# Altium PCB Time4CM4_Riser.PcbDoc (part 2 of 2)
Units mil, origin at the board's own origin, x right, y up, seen from the top; angles counter-clockwise.
Board outline 2171.6 x 1574.73 mil, 2 copper layers (Top Layer, Bottom Layer), stack 61.756 mil thick; 2 components, 138 nets, 412 pads, 162 vias.
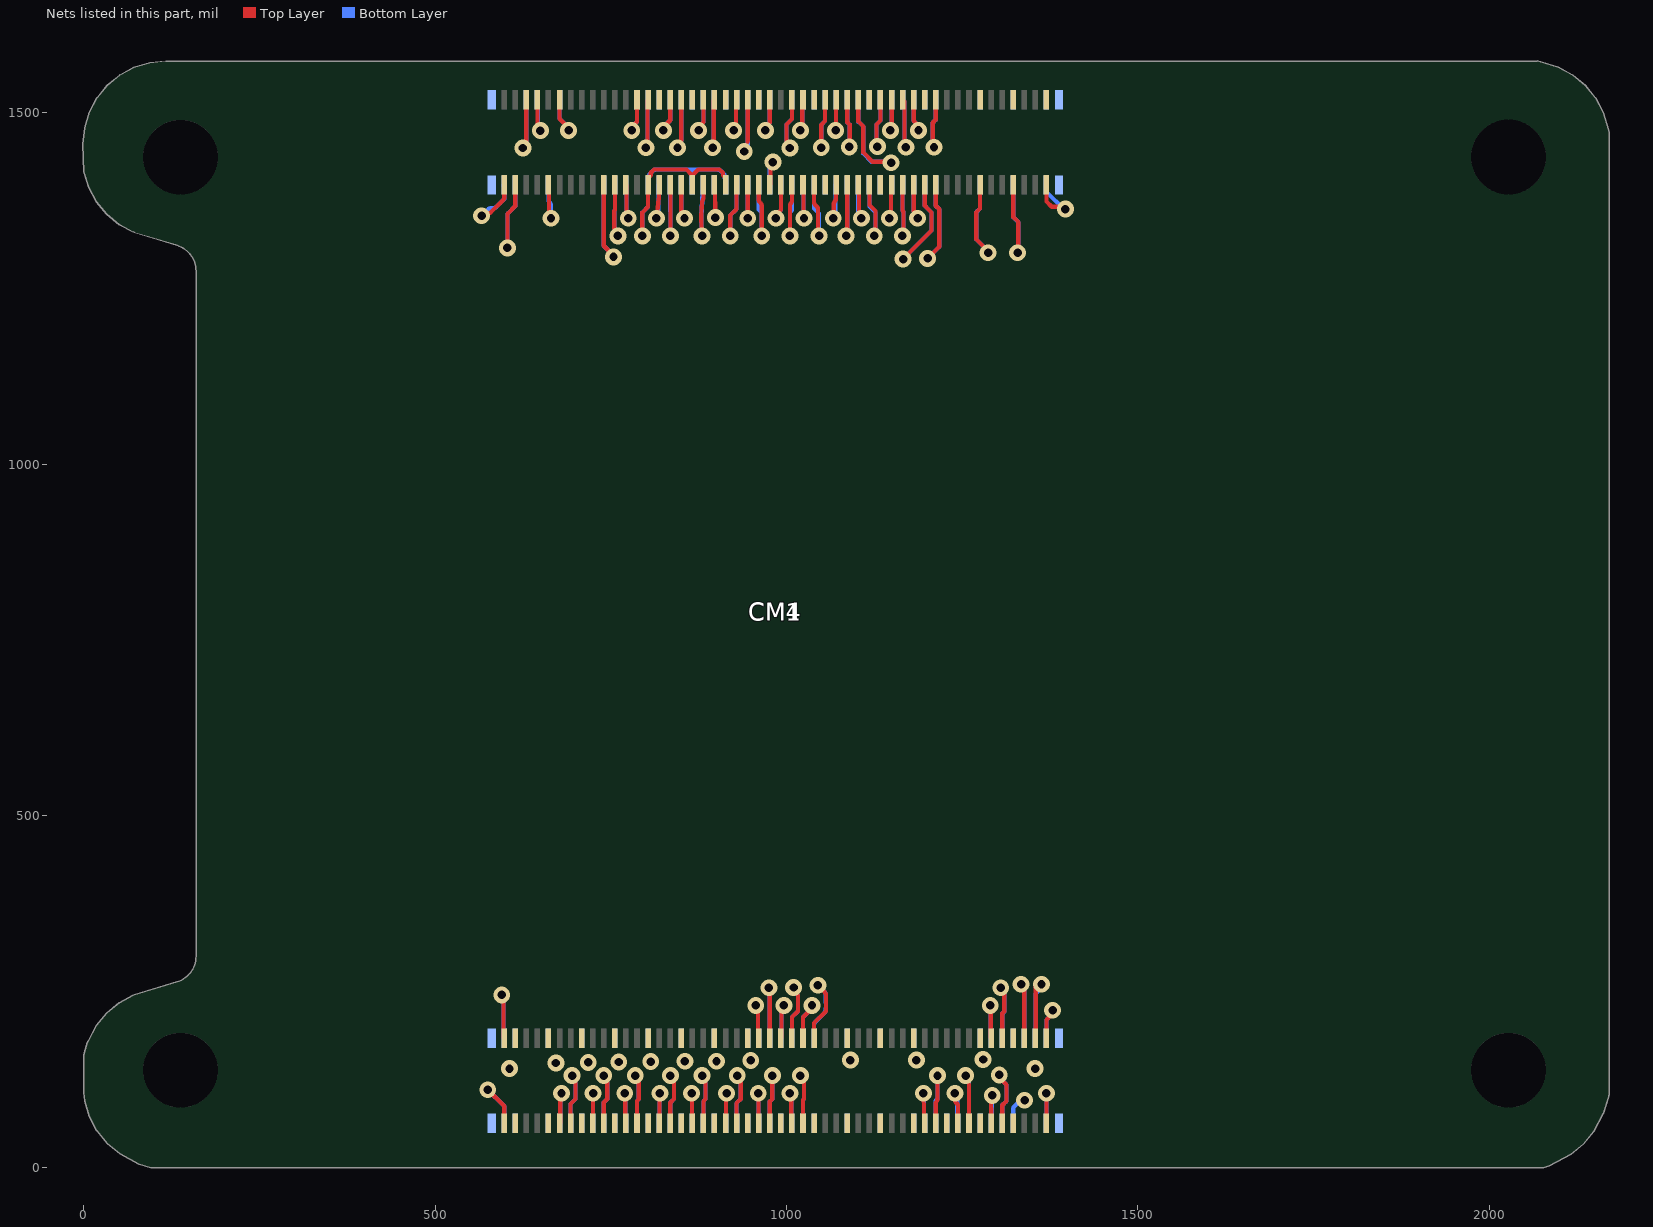
[diagram p2: the nets of this part, all layers, seen from the top]

## Via types
v1: diameter 24, hole 12, Top Layer to Bottom Layer, tented both sides, 162 vias

## Nets (pads, with @x,y where several pads share a name; then routed paths per layer and width w, separated by ;. In a path a pad name is that pad's centre, name@x,y a point inside that pad or via, vN(x,y) a via of type N, cw(c..) or ccw(c..) an arc to the next point about the centre after c; other vN are vias at no path point) (continued)
GND: CM1.1 CM1.2 CM1.7 CM1.8 CM1.13 CM1.14 CM1.22 CM1.23 CM1.32 CM1.33 CM1.42 CM1.43 CM1.52 CM1.53 CM1.59 CM1.60 CM1.65 CM1.66 CM1.71 CM1.74 CM1.98 CM1.107 CM1.108 CM1.113 CM1.114 CM1.120 CM1.125 CM1.126 CM1.131 CM1.132 CM1.137 CM1.138 CM1.144 CM1.150 CM1.155 CM1.156 CM1.161 CM1.162 CM1.167 CM1.168 CM1.173 CM1.174 CM1.179 CM1.180 CM1.185 CM1.186 CM1.191 CM1.192 CM1.197 CM1.198 CM4.1 CM4.2 CM4.7 CM4.8 CM4.13 CM4.14 CM4.22 CM4.23 CM4.32 CM4.33 CM4.42 CM4.43 CM4.52 CM4.53 CM4.59 CM4.60 CM4.65 CM4.66 CM4.71 CM4.74 CM4.98 CM4.107 CM4.108 CM4.113 CM4.114 CM4.120 CM4.125 CM4.126 CM4.131 CM4.132 CM4.137 CM4.138 CM4.144 CM4.150 CM4.155 CM4.156 CM4.161 CM4.162 CM4.167 CM4.168 CM4.173 CM4.174 CM4.179 CM4.180 CM4.185 CM4.186 CM4.191 CM4.192 CM4.197 CM4.198 pad.2 | length 1520.5
  Top Layer w6: v1(603.06,1307.94) 603.06,1356.34 614.17,1367.46 CM4.98@614.17,1397.64 ; v1(795,1325) 795,1358.28 803.15,1366.43 CM4.74@803.15,1397.64 804.09,1398.58 804.09,1408.42 806.96,1411.29 806.96,1414.73 811.65,1419.42 857.65,1419.42 865.16,1411.9 ; CM4.66@866.14,1397.64 866.42,1397.91 866.42,1411.19 874.64,1419.42 904.89,1419.42 909.57,1414.73 909.57,1411.29 912.45,1408.42 912.45,1398.58 CM4.60@913.39,1397.64 ; CM4.52@976.38,1397.64 977.31,1398.58 977.31,1426.64 v1(980.67,1430) ; v1(1201,1293) 1217.61,1309.61 1217.61,1362.84 1212.6,1367.86 CM4.22@1212.6,1397.64 ; CM4.14@1275.59,1397.64 1275.59,1363.87 1270,1358.28 1270,1320.28 1287,1303.28 v1(1287,1301) ; CM4.8@1322.83,1397.64 1322.83,1351.67 1330,1344.5 1330,1302 v1(1329,1301) ; CM4.2@1370.08,1397.64 1370.08,1374.01 1377.65,1366.44 1393.56,1366.44 v1(1397,1363)
  Bottom Layer w6: v1(603.06,1307.94) 603.06,1356.34 614.17,1367.46 CM1.98@614.17,1397.44 ; v1(795,1325) 795,1358.28 803.15,1366.43 CM1.74@803.15,1397.44 804.09,1398.38 804.09,1406.65 cw(c810.09,1406.61) 804.12,1407.27 804.37,1409.49 804.44,1410.14 cw(c810.4,1409.49) 806.14,1413.72 806.95,1414.52 809.91,1417.48 cw(c814.13,1413.22) 814.13,1419.22 862.45,1419.22 ; CM1.66@866.14,1397.44 865.2,1398.38 865.2,1416.46 862.45,1419.22 ; 909.57,1414.53 910.35,1413.76 cw(c906.13,1409.49) 912.1,1410.14 912.17,1409.49 912.41,1407.27 cw(c906.45,1406.61) 912.45,1406.61 912.45,1398.38 CM1.60@913.39,1397.44 ; 909.55,1414.56 906.63,1417.48 ccw(c902.4,1413.22) 902.4,1419.22 862.45,1419.22 ; CM1.52@976.38,1397.44 976.38,1423.22 cw(c982.38,1423.22) 978.14,1427.46 v1(980.67,1430) ; v1(1201,1293) 1217.61,1309.61 1217.61,1362.84 1212.6,1367.86 CM1.22@1212.6,1397.44 ; CM1.14@1275.59,1397.44 1275.59,1363.87 1270.92,1359.21 1270,1358.28 1270,1320.28 1287,1303.28 v1(1287,1301) ; CM1.108@1322.83,62.01 1322.83,82.5 cw(c1328.83,82.5) 1324.8,86.95 1327.29,89.2 ccw(c1323.26,93.64) 1327.48,89.38 1331.36,93.26 cw(c1335.58,89) 1335.58,95 v1(1339,95) ; CM1.8@1322.83,1397.44 1322.83,1351.57 1330,1344.41 1330,1302 v1(1329,1301) ; CM1.2@1370.08,1397.44 1370.08,1387.6 1394.68,1363 v1(1397,1363)
  other v1: 606,140 1354,140 672,148 717.98,148.87 761.5,149.46 807,150 855.51,150.51 900.51,150.51 949.34,151.61 1091,152 1185,152 1280,153
GPIO_0: CM1.36 CM4.36 | length 100.6
  Top Layer w6: CM4.36@1102.36,1397.64 1103.3,1396.7 1103.3,1353.32 v1(1106.61,1350) v1@1105,1348.39
  Bottom Layer w6: CM1.36@1102.36,1397.44 1102.36,1356.74 ccw(c1108.36,1356.74) v1@1104.1,1352.51 ; v1@1104.12,1352.5 v1(1106.61,1350)
GPIO_1: CM1.35 CM4.35 | length 250.3
  Top Layer w6: CM4.35@1103.3,1529.68 1103.3,1519.84 CM4.35@1102.36,1518.9 1102.36,1487.64 1109.49,1480.51 1109.49,1443.72 1122.7,1430.51 1147.49,1430.51 v1(1149,1429) v1@1151,1431
  Bottom Layer w6: CM1.35@1102.36,1518.7 1102.36,1487.51 1109.49,1480.38 1109.49,1458.79 1109.49,1442.22 1121.21,1430.51 v1@1137.78,1430.51
GPIO_2: CM1.58 CM4.58 | length 155.2
  Top Layer w6: v1@918.44,1329.74 ccw(c924.44,1329.74) v1@918.98,1327.25 ; v1(920,1325) 920,1353.8 929.13,1362.93 CM4.58@929.13,1397.64
  Bottom Layer w6: v1(920,1325) 920,1353.7 929.13,1362.83 CM1.58@929.13,1397.44
GPIO_3: CM1.56 CM4.56 | length 95.2
  Top Layer w6: CM4.56@944.88,1397.64 944.94,1397.58 944.94,1350.06 v1(945,1350)
  Bottom Layer w6: CM1.56@944.88,1397.44 944.94,1397.38 944.94,1350.06 v1(945,1350)
GPIO_4: CM1.54 CM4.54 | length 151.6
  Top Layer w6: CM4.54@960.63,1397.64 960.63,1376.85 ; 963.27,1371.73 cw(c959,1367.51) 965,1367.51 v1(965,1325) ; 960.63,1376.86 ccw(c966.63,1376.86) 962.38,1372.62 cw(c966.63,1376.86) 960.63,1376.85
  Bottom Layer w6: CM1.54@960.63,1397.44 960.63,1362.65 965,1358.28 v1(965,1325)
GPIO_5: CM1.34 CM4.34 | length 153.5
  Top Layer w6: CM4.34@1118.11,1397.64 1118.11,1368.72 1126.61,1360.22 1126.61,1326.61 v1(1125,1325)
  Bottom Layer w6: CM1.34@1118.11,1397.44 1118.11,1366.79 1126.61,1358.28 1126.61,1326.61 v1(1125,1325)
GPIO_6: CM1.30 CM4.30 | length 99.8
  Top Layer w6: v1@1145,1348.39 v1(1146.61,1350) 1148.67,1352.06 1148.67,1396.7 CM4.30@1149.61,1397.64
  Bottom Layer w6: v1(1146.61,1350) 1148.67,1352.06 1148.67,1396.5 CM1.30@1149.61,1397.44
GPIO_7: CM1.37 CM4.37 | length 137.8
  Top Layer w6: CM4.37@1086.61,1518.9 1086.61,1486.67 1090,1483.28 1090,1452.02 v1(1089.49,1451.52)
  Bottom Layer w6: CM1.37@1086.61,1518.7 1086.61,1486.67 1090,1483.28 1090,1452.02 v1(1089.49,1451.52)
GPIO_8: CM1.39 CM4.39 | length 88.3
  Top Layer w6: v1(1070,1475) 1070.43,1475.43 1070.43,1518.47 CM4.39@1070.87,1518.9
  Bottom Layer w6: v1(1070,1475) 1070.43,1475.43 1070.43,1518.27 CM1.39@1070.87,1518.7
GPIO_9: CM1.40 CM4.40 | length 97
  Top Layer w6: v1@1066.61,1350 ccw(c1061.43,1353.03) 1067.43,1352.99 1067.43,1369.95 cw(c1073.43,1369.95) 1068.71,1373.65 ; 1069.16,1374.22 ccw(c1064.43,1377.92) 1070.43,1377.92 1070.43,1386.86 CM4.40@1070.87,1397.64
  Bottom Layer w6: v1(1066.61,1350) 1069.93,1353.32 1069.93,1396.5 CM1.40@1070.87,1397.44
GPIO_10: CM1.44 CM4.44 | length 159.8
  Top Layer w6: CM4.44@1039.37,1397.64 1039.37,1373.11 ; v1(1046.5,1325) 1045,1326.5 1045,1362.51 ; 1039.37,1373.12 ccw(c1045.37,1373.12) 1041.11,1368.89 ; 1039.37,1373.11 ccw(c1045.37,1373.12) 1041.11,1368.89 ; 1041.11,1368.89 1043.26,1366.74 ; 1043.27,1366.73 cw(c1039,1362.51) 1045,1362.51 ; 1043.27,1366.73 cw(c1039,1362.51) 1045,1362.51
  Bottom Layer w6: CM1.44@1039.37,1397.44 1039.37,1363.91 1046.5,1356.78 v1(1046.5,1325)
GPIO_11: CM1.38 CM4.38 | length 153.4
  Top Layer w6: v1@1085,1323.39 v1@1088.31,1326.69 ; v1(1085,1325) 1086.69,1326.69 v1@1088.31,1326.69 ; CM4.38@1086.61,1397.64 1086.61,1328.39 v1@1088.31,1326.69
  Bottom Layer w6: v1(1085,1325) 1086.61,1326.61 CM1.38@1086.61,1397.44
GPIO_12: CM1.31 CM4.31 | length 139.7
  Top Layer w6: v1(1129.49,1452) 1128,1453.49 1128,1483.28 1133.86,1489.14 CM4.31@1133.86,1518.9
  Bottom Layer w6: v1(1129.49,1452) 1128,1453.49 1128,1483.28 1133.86,1489.14 CM1.31@1133.86,1518.7
GPIO_13: CM1.28 CM4.28 | length 147.5
  Top Layer w6: v1(1165,1325) 1166.61,1326.61 1166.61,1359.46 1165.35,1360.72 CM4.28@1165.35,1397.64
  Bottom Layer w6: v1(1165,1325) 1166.61,1326.61 1166.61,1359.36 1165.35,1360.62 CM1.28@1165.35,1397.44
GPIO_16: CM1.29 CM4.29 | length 89.3
  Top Layer w6: v1(1148,1475) 1149.8,1476.8 1149.8,1518.7 CM4.29@1149.61,1518.9
  Bottom Layer w6: v1(1148,1475) 1149.8,1476.8 1149.8,1518.5 CM1.29@1149.61,1518.7
GPIO_17: CM1.50 CM4.50 | length 96.1
  Top Layer w6: v1@985,1354.87 992.13,1362 CM4.50@992.13,1397.64
  Bottom Layer w6: v1(985,1350) 985,1354.87 992.13,1362 CM1.50@992.13,1397.44
GPIO_19: CM1.26 CM4.26 | length 87
  Top Layer w6: v1@1181.1,1360.38 CM4.26@1181.1,1397.64
  Bottom Layer w6: CM1.26@1181.1,1397.44 1181.1,1360.38 1186.61,1354.87 v1(1186.61,1350)
GPIO_20: CM1.27 CM4.27 | length 139.4
  Top Layer w6: CM4.27@1165.35,1518.9 1168,1516.25 1168,1453 v1(1170,1451)
  Bottom Layer w6: CM1.27@1165.35,1518.7 1168,1516.05 1168,1453 v1(1170,1451)
GPIO_21: CM1.25 CM4.25 | length 93.2
  Top Layer w6: CM4.25@1181.1,1518.9 1181.1,1488.77 1192,1477.87 1189.13,1475 v1(1188,1475)
  Bottom Layer w6: CM1.25@1181.1,1518.7 1181.1,1488.77 v1@1190,1479.87
GPIO_22: CM1.46 CM4.46 | length 96.2
  Top Layer w6: CM4.46@1023.62,1397.64 1024.31,1396.95 1024.31,1350.69 v1(1025,1350)
  Bottom Layer w6: CM1.46@1023.62,1397.44 1024.31,1396.75 1024.31,1350.69 v1(1025,1350)
GPIO_23: CM1.47 CM4.47 | length 148.3
  Top Layer w6: v1(1005,1450) 1005,1454.87 1000,1459.87 1000,1483.28 1007.87,1491.16 CM4.47@1007.87,1518.9
  Bottom Layer w6: v1(1005,1450) 1005,1454.87 1000,1459.87 1000,1483.28 1007.87,1491.16 CM1.47@1007.87,1518.7
GPIO_24: CM1.45 CM4.45 | length 90.6
  Top Layer w6: v1(1020,1475) 1022.68,1477.69 1022.68,1517.96 CM4.45@1023.62,1518.9
  Bottom Layer w6: v1(1020,1475) 1022.68,1477.69 1022.68,1517.76 CM1.45@1023.62,1518.7
GPIO_25: CM1.41 CM4.41 | length 141.2
  Top Layer w6: v1(1049.49,1450.51) 1049.49,1482.78 1055.12,1488.4 CM4.41@1055.12,1518.9
  Bottom Layer w6: v1(1049.49,1450.51) 1049.49,1482.78 1055.12,1488.4 CM1.41@1055.12,1518.7
GPIO_26: CM1.24 CM4.24 | length 252.8
  Top Layer w6: v1(1166,1292) 1206.61,1332.61 1206.61,1358.28 1201.6,1363.3 1196.85,1368.05 CM4.24@1196.85,1397.64
  Bottom Layer w6: v1(1166,1292) 1206.61,1332.61 1206.61,1358.28 1201.6,1363.3 1196.85,1368.05 CM1.24@1196.85,1397.44
GPIO_27: CM1.48 CM4.48 | length 158.1
  Top Layer w6: v1(1005,1325) 1005,1367.51 ; CM4.48@1007.87,1397.64 1007.87,1375.36 ; 1005,1367.51 cw(c1011,1367.51) 1006.17,1371.07 ccw(c1011,1367.51) 1005,1367.51 ; 1007.87,1375.36 cw(c1001.87,1375.36) 1006.7,1371.8 ccw(c1001.87,1375.36) 1007.87,1375.36
  Bottom Layer w6: v1(1005,1325) 1005,1356.07 ; 1006.75,1360.3 ccw(c1011,1356.07) 1005,1356.07 ; CM1.48@1007.87,1397.44 1007.87,1361.42 1006.76,1360.31 ccw(c1011,1356.07) 1005,1356.07
GPIO_44: CM1.82 CM4.82 | length 216.5
  Top Layer w6: CM4.82@740.16,1397.64 740.16,1310.86 754,1297.02 v1(754,1295)
  Bottom Layer w6: CM1.82@740.16,1397.44 740.16,1310.86 754,1297.02 v1(754,1295)
GPIO_45: CM1.80 CM4.80 | length 137.9
  Top Layer w6: v1@755,1335.03 755,1360.49 755.91,1361.4 CM4.80@755.91,1397.64
  Bottom Layer w6: CM1.80@755.91,1397.44 755.91,1361.3 755,1360.39 755,1335.03 760.16,1329.87 v1(760.16,1325)
GPIO_VREF: CM1.78 CM4.78 | length 97.8
  Top Layer w6: CM4.78@771.65,1397.64 772.59,1396.7 772.59,1352.41 v1(775,1350)
  Bottom Layer w6: CM1.78@771.65,1397.44 772.59,1396.5 772.59,1352.41 v1(775,1350)
HDMI0_CEC: CM1.151 CM4.151 | length 144.4
  Top Layer w6: v1(975,255) 976.38,253.62 CM4.151@976.38,183.46
  Bottom Layer w6: v1(975,255) 976.38,253.62 CM1.151@976.38,183.27
HDMI0_CLK_N: CM1.190 CM4.190 | length 88.1
  Top Layer w6: CM4.190@677.17,62.2 678.1,63.14 678.1,103.1 v1(680,105)
  Bottom Layer w6: CM1.190@677.17,62.01 678.1,62.95 678.1,103.1 v1(680,105)
HDMI0_CLK_P: CM1.188 CM4.188 | length 133.9
  Top Layer w6: CM4.188@692.91,62.2 692.91,89.63 700,96.72 v1@700,120.13
  Bottom Layer w6: CM1.188@692.91,62.01 692.91,89.63 700,96.72 700,120.13 695,125.13 v1(695,130)
HDMI0_HP: CM1.153 CM4.153 | length 96.8
  Top Layer w6: v1(956.38,230) 959.69,226.69 959.69,184.4 CM4.153@960.63,183.46
  Bottom Layer w6: v1(956.38,230) 959.69,226.69 959.69,184.21 CM1.153@960.63,183.27
HDMI0_SCL: CM1.200 CM4.200 | length 115.2
  Top Layer w6: v1(575,110) 598.43,86.57 CM4.200@598.43,62.2
  Bottom Layer w6: v1(575,110) 598.43,86.57 CM1.200@598.43,62.01
HDMI0_SDA: CM1.199 CM4.199 | length 126.1
  Top Layer w6: v1(595,245) 597.49,242.51 597.49,184.4 CM4.199@598.43,183.46
  Bottom Layer w6: v1(595,245) 597.49,242.51 597.49,184.21 CM1.199@598.43,183.27
HDMI0_TX0_N: CM1.184 CM4.184 | length 86.3
  Top Layer w6: CM4.184@724.41,62.2 724.7,62.5 724.7,104.71 v1(725,105)
  Bottom Layer w6: CM1.184@724.41,62.01 724.7,62.3 724.7,104.71 v1(725,105)
HDMI0_TX0_P: CM1.182 CM4.182 | length 132
  Top Layer w6: CM4.182@740.16,62.2 740.16,91.87 745,96.72 v1@745,120.13
  Bottom Layer w6: v1(740,130) 740,125.13 745,120.13 745,96.72 740.16,91.87 CM1.182@740.16,62.01
HDMI0_TX1_N: CM1.178 CM4.178 | length 87.2
  Top Layer w6: v1(770,105) 770.83,104.17 770.83,63.03 CM4.178@771.65,62.2
  Bottom Layer w6: v1(770,105) 770.83,104.17 770.83,62.84 CM1.178@771.65,62.01
HDMI0_TX1_P: CM1.176 CM4.176 | length 130.1
  Top Layer w6: CM4.176@787.4,62.2 787.4,94.12 790,96.72 v1@790,120.13
  Bottom Layer w6: v1(785,130) 785,125.13 790,120.13 790,96.72 787.4,94.12 CM1.176@787.4,62.01
HDMI0_TX2_N: CM1.172 CM4.172 | length 86.7
  Top Layer w6: CM4.172@818.9,62.2 819.45,62.76 819.45,104.45 v1(820,105)
  Bottom Layer w6: CM1.172@818.9,62.01 819.45,62.56 819.45,104.45 v1(820,105)
HDMI0_TX2_P: CM1.170 CM4.170 | length 132.4
  Top Layer w6: CM4.170@834.65,62.2 834.65,91.36 840,96.72 v1@840,120.13
  Bottom Layer w6: CM1.170@834.65,62.01 834.65,91.36 840,96.72 840,120.13 835,125.13 v1(835,130)
HDMI1_CEC: CM1.149 CM4.149 | length 96.8
  Top Layer w6: CM4.149@992.13,183.46 993.06,184.4 993.06,226.69 v1(996.38,230)
  Bottom Layer w6: CM1.149@992.13,183.27 993.06,184.21 993.06,226.69 v1(996.38,230)
HDMI1_CLK_N: CM1.166 CM4.166 | length 86.7
  Top Layer w6: v1(865,105) 865.57,104.43 865.57,62.78 CM4.166@866.14,62.2
  Bottom Layer w6: v1(865,105) 865.57,104.43 865.57,62.58 CM1.166@866.14,62.01
HDMI1_CLK_P: CM1.164 CM4.164 | length 130.6
  Top Layer w6: CM4.164@881.89,62.2 881.89,93.61 885,96.72 v1@885,120.13
  Bottom Layer w6: v1(880,130) 880,125.13 885,120.13 885,96.72 881.89,93.61 CM1.164@881.89,62.01
HDMI1_HP: CM1.143 CM4.143 | length 206.8
  Top Layer w6: CM4.143@1039.37,183.46 1039.37,204.71 1056.38,221.72 1056.38,244.39 ccw(c1050.38,244.39) 1055.35,247.76 1054.7,248.71 ; v1(1044.87,258.7) 1053.98,249.59 ; 1053.98,249.59 cw(c1049.73,245.35) 1054.7,248.71 ; 1053.98,249.59 cw(c1049.73,245.35) 1054.7,248.71
  Bottom Layer w6: CM1.143@1039.37,183.27 1039.37,202.22 ; v1(1044.87,258.7) 1054.03,249.54 ; 1039.37,202.22 cw(c1045.37,202.22) 1041.11,206.45 ; 1039.37,202.22 cw(c1045.37,202.22) 1041.11,206.45 ; 1041.11,206.45 1054.03,219.36 ; 1054.03,219.36 ccw(c1049.78,223.61) 1055.78,223.61 cw(c1049.78,223.61) 1054.03,219.37 ; 1054.03,249.54 cw(c1049.78,245.29) 1055.78,245.29 ; 1054.03,249.54 cw(c1049.78,245.29) 1055.78,245.29 ; 1055.78,235.49 ccw(c1061.78,235.52) 1055.91,234.28 ; 1055.78,235.49 1055.78,245.29 ; 1055.78,235.49 1055.78,245.29 ; 1055.91,225.7 ccw(c1036.38,230) 1055.91,234.28 ; 1055.91,225.7 ccw(c1061.78,224.48) 1055.78,224.51 cw(c1061.78,224.48) 1055.91,225.7 ; 1055.91,225.7 ccw(c1036.38,230) 1055.91,234.28
HDMI1_SCL: CM1.147 CM4.147 | length 142.8
  Top Layer w6: CM4.147@1007.87,183.46 1007.87,213.21 1016.38,221.72 1016.38,244.47
  Bottom Layer w6: CM1.147@1007.87,183.27 1007.87,213.21 1016.38,221.72 1016.38,244.47 1010.25,250.59 v1(1010.25,255.46)
HDMI1_SDA: CM1.145 CM4.145 | length 112.7
  Top Layer w6: CM4.145@1023.62,183.46 1023.62,213.06 1032.93,222.37 v1@1032.93,224.07 ; v1(1036.38,230) v1@1034.69,228.31 ; v1@1032.93,224.07 cw(c1038.93,224.07) v1@1034.69,228.31 ; v1@1032.93,224.07 cw(c1038.93,224.07) v1@1034.69,228.31
  Bottom Layer w6: CM1.145@1023.62,183.27 1023.62,213.06 1032.93,222.37 v1@1032.93,224.07 ; v1(1036.38,230) v1@1034.69,228.31 ; v1@1032.93,224.07 cw(c1038.93,224.07) v1@1034.69,228.31 ; v1@1032.93,224.07 cw(c1038.93,224.07) v1@1034.69,228.31
HDMI1_TX0_N: CM1.160 CM4.160 | length 87.1
  Top Layer w6: CM4.160@913.39,62.2 914.19,63.01 914.19,104.19 v1(915,105)
  Bottom Layer w6: CM1.160@913.39,62.01 914.19,62.82 914.19,104.19 v1(915,105)
HDMI1_TX0_P: CM1.158 CM4.158 | length 132.8
  Top Layer w6: CM4.158@929.13,62.2 929.13,90.85 935,96.72 v1@935,120.13
  Bottom Layer w6: CM1.158@929.13,62.01 929.13,90.85 935,96.72 935,120.13 930,125.13 v1(930,130)
HDMI1_TX1_N: CM1.154 CM4.154 | length 86.3
  Top Layer w6: v1(960,105) 960.31,104.69 960.31,62.52 CM4.154@960.63,62.2
  Bottom Layer w6: v1(960,105) 960.31,104.69 960.31,62.32 CM1.154@960.63,62.01
HDMI1_TX1_P: CM1.152 CM4.152 | length 138.8
  Top Layer w6: CM4.152@976.38,62.2 976.38,93.09 980,96.72 v1(980,130)
  Bottom Layer w6: CM1.152@976.38,62.01 976.38,93.09 980,96.72 v1(980,130)
HDMI1_TX2_N: CM1.148 CM4.148 | length 88.2
  Top Layer w6: v1(1005,105) 1006.94,103.06 1006.94,63.14 CM4.148@1007.87,62.2
  Bottom Layer w6: v1(1005,105) 1006.94,103.06 1006.94,62.95 CM1.148@1007.87,62.01
HDMI1_TX2_P: CM1.146 CM4.146 | length 129.1
  Top Layer w6: CM4.146@1023.62,62.2 1023.62,95.34 1025,96.72 v1@1025,120.13
  Bottom Layer w6: v1(1020,130) 1020,125.13 1025,120.13 1025,96.72 1023.62,95.34 CM1.146@1023.62,62.01
LED_ACT: CM1.21 CM4.21 | length 140.7
  Top Layer w6: v1(1210,1451) 1208.25,1452.75 1208.25,1485.95 1212.6,1490.3 CM4.21@1212.6,1518.9
  Bottom Layer w6: v1(1210,1451) 1208.25,1452.75 1208.25,1485.95 1212.6,1490.3 CM1.21@1212.6,1518.7
LED_PWR: CM1.95 CM4.95 | length 129.8
  Top Layer w6: v1@629.92,1459.79 CM4.95@629.92,1518.9
  Bottom Layer w6: v1(625,1450) 625,1454.87 629.92,1459.79 CM1.95@629.92,1518.7
NetCM1_51: CM1.51 CM4.51 | length 79
  Top Layer w6: 976.38,1486.25 CM4.51@976.38,1518.9
  Bottom Layer w6: v1(970,1475) 970,1479.87 976.38,1486.25 CM1.51@976.38,1518.7
NetCM1_55: CM1.55 CM4.55 | length 136.6
  Top Layer w6: 944.59,1458.62 ccw(c938.88,1460.45) 944.88,1460.42 CM4.55@944.88,1518.9
  Bottom Layer w6: v1@939.47,1445 v1(940,1445) 940,1449.87 944.88,1454.75 CM1.55@944.88,1518.7
nEXTRST: CM1.100 CM4.100 | length 124.3
  Top Layer w6: v1(566.39,1353.61) 569.83,1357.06 575.57,1357.06 ccw(c575.57,1363.06) 579.8,1358.8 596.7,1375.7 ccw(c592.43,1379.91) 598.43,1379.91 CM4.100@598.43,1397.64
  Bottom Layer w6: v1(566.39,1353.61) 575.29,1362.52 cw(c579.53,1358.27) 579.53,1364.27 582.79,1364.27 ccw(c582.79,1370.27) 587.01,1366.01 591.99,1370.99 598.43,1377.43 CM1.100@598.43,1397.44 CM1.100@597.49,1396.5
nRPIBOOT: CM1.93 CM4.93 | length 91.1
  Top Layer w6: CM4.93@645.67,1518.9 645.67,1485.16 ccw(c660.45,1485.16) v1(650,1474.71)
  Bottom Layer w6: CM1.93@645.67,1518.7 646.61,1517.76 646.61,1478.11 v1(650,1474.71)
PCIe_CLK_N: CM1.112 CM4.112 | length 78.9
  Top Layer w6: 1290.98,86.3 cw(c1296.94,87.06) 1290.94,87.03 1290.94,99.94 v1(1293,102) ; CM4.112@1291.34,62.2 1291.34,83.15 ccw(c1285.34,83.15) 1291.29,83.9
  Bottom Layer w6: CM1.112@1291.34,62.01 1292.17,62.84 1292.17,101.17 v1(1293,102)
PCIe_CLK_nREQ: CM1.102 CM4.102 | length 85.9
  Top Layer w6: v1(1370,105) 1370.04,104.96 1370.04,62.24 CM4.102@1370.08,62.2
  Bottom Layer w6: v1(1370,105) 1370.04,104.96 CM1.102@1370.04,62.05 ; CM1.102@1370.04,62.05 CM1.102@1370.08,62.01
PCIe_CLK_P: CM1.110 CM4.110 | length 137.3
  Top Layer w6: CM4.110@1307.09,62.2 1307.09,87.8 1313,93.72 1313,117.13 1310,120.13
  Bottom Layer w6: v1(1302.85,131) 1302.85,127.28 1313,117.13 1313,93.72 1307.09,87.8 CM1.110@1307.09,62.01
PCIe_nRST: CM1.109 CM4.109 | length 137.9
  Top Layer w6: CM4.109@1307.09,183.46 1307.09,218.23 1310,221.14 v1@1310,245.13
  Bottom Layer w6: v1(1305,255) 1305,250.13 1310,245.13 1310,221.05 1307.09,218.13 CM1.109@1307.09,183.27
PCIe_RX_N: CM1.118 CM4.118 | length 94
  Top Layer w6: v1@1240,103.63 ccw(c1234,103.63) v1(1239.84,105) 1240,104.84 v1@1240,95.49 ; 1242.36,90.64 cw(c1238.09,86.43) 1244.09,86.43 CM4.118@1244.09,62.2 ; v1@1240,95.49 ccw(c1246,95.49) 1241.75,91.26 cw(c1246,95.49) v1@1240,95.49
  Bottom Layer w6: v1(1239.84,105) 1243.16,101.69 1243.16,62.95 CM1.118@1244.09,62.01
PCIe_RX_P: CM1.116 CM4.116 | length 125.6
  Top Layer w6: CM4.116@1259.84,62.2 1259.84,117.8
  Bottom Layer w6: v1(1255,130) 1255,125.13 1259.84,120.29 CM1.116@1259.84,62.01
PCIe_TX_N: CM1.124 CM4.124 | length 86.3
  Top Layer w6: v1(1195,105) v1@1195,94.06 ; CM4.124@1196.85,62.2 1195.91,72.98 1195.91,88.64 ; v1@1195,94.06 ccw(c1201,94.1) 1195.14,92.8 cw(c1201,94.1) v1@1195,94.06 ; 1195.91,88.64 ccw(c1189.91,88.64) 1195.77,89.94 cw(c1189.91,88.64) 1195.91,88.64
  Bottom Layer w6: v1(1195,105) 1195.92,104.08 1195.92,62.93 CM1.124@1196.85,62.01
PCIe_TX_P: CM1.122 CM4.122 | length 138.9
  Top Layer w6: CM4.122@1212.6,62.2 1212.6,90.11 cw(c1218.6,90.11) 1213.41,93.12 ; v1(1215,130) 1215,97.48 ; 1215,97.49 cw(c1209,97.49) 1214.19,94.48 ccw(c1209,97.49) 1215,97.49
  Bottom Layer w6: CM1.122@1212.6,62.01 1212.6,94.31 1215,96.72 v1(1215,130)
RUN_PG: CM1.92 CM4.92 | length 97.5
  Top Layer w6: CM4.92@661.42,1397.64 662.35,1396.7 662.35,1352.65 v1(665,1350)
  Bottom Layer w6: CM1.92@661.42,1397.44 661.42,1376.5 ccw(c667.42,1376.5) 663.17,1372.26 cw(c659,1367.95) 665,1367.95 v1(665,1350)
SD_CLK: CM1.57 CM4.57 | length 91.1
  Top Layer w6: v1(924.88,1475) 928.2,1478.32 928.2,1517.96 CM4.57@929.13,1518.9
  Bottom Layer w6: v1(924.88,1475) 928.2,1478.32 928.2,1517.76 CM1.57@929.13,1518.7
SD_CMD: CM1.62 CM4.62 | length 93.9
  Top Layer w6: CM4.62@897.64,1397.64 898.57,1396.7 898.57,1375.49 898.62,1371.86 898.86,1351.55 v1(898.87,1351)
  Bottom Layer w6: CM1.62@897.64,1397.44 898.57,1396.5 898.57,1375.55 ccw(c904.58,1375.55) 898.58,1375.48 898.86,1351.55 v1(898.87,1351)
SD_DAT0: CM1.63 CM4.63 | length 93.3
  Top Layer w6: v1(875,1475) 875,1479.87 881.89,1486.76 CM4.63@881.89,1518.9
  Bottom Layer w6: v1(875,1475) 875,1479.87 881.89,1486.76 CM1.63@881.89,1518.7
SD_DAT1: CM1.67 CM4.67 | length 129.2
  Top Layer w6: v1@850.39,1460.26 CM4.67@850.39,1518.9
  Bottom Layer w6: v1(845,1450.42) 845,1455.29 850.39,1460.68 CM1.67@850.39,1518.7
SD_DAT2: CM1.69 CM4.69 | length 95.6
  Top Layer w6: v1(825,1475) 825,1479.87 834.65,1489.52 CM4.69@834.65,1518.9
  Bottom Layer w6: v1(825,1475) 825,1479.87 834.65,1489.52 CM1.69@834.65,1518.7
SD_DAT3: CM1.61 CM4.61 | length 139
  Top Layer w6: v1(895,1450.42) 896.7,1452.12 896.7,1517.96 CM4.61@897.64,1518.9
  Bottom Layer w6: v1(895,1450.42) 896.7,1452.12 896.7,1517.76 CM1.61@897.64,1518.7
SD_DAT4: CM1.68 CM4.68 | length 87.5
  Top Layer w6: v1@850.39,1359.48 CM4.68@850.39,1397.64
  Bottom Layer w6: CM1.68@850.39,1397.44 850.39,1359.48 855,1354.87 v1(855,1350)
SD_DAT5: CM1.64 CM4.64 | length 143.5
  Top Layer w6: 878.88,1350.28 v1(880,1325) ; 880.49,1374.89 ccw(c886,1372.51) 880.01,1372.85 878.88,1352.62 ccw(c898.86,1351.55) 878.86,1351.16 878.87,1350.41 ; 881.4,1377 ccw(c875.89,1379.38) 881.89,1379.38 CM4.64@881.89,1397.64 ; 878.87,1350.41 ccw(c884.87,1350.54) 878.88,1350.32 cw(c884.87,1350.54) 878.87,1350.41
  Bottom Layer w6: 878.88,1350.28 v1(880,1325) ; CM1.64@881.89,1397.44 880.96,1386.74 ccw(c886.94,1386.26) 880.95,1386.58 878.89,1352.71 ccw(c898.86,1351.55) 878.86,1351.16 878.87,1350.41 ; 878.87,1350.41 ccw(c884.87,1350.54) 878.88,1350.32 cw(c884.87,1350.54) 878.87,1350.41
SD_DAT6: CM1.72 CM4.72 | length 97.7
  Top Layer w6: v1(815,1350) 817.74,1371.86 818.85,1380.72 ; CM4.72@818.9,1397.64 818.9,1381.46 ; 818.85,1380.72 ccw(c812.9,1381.46) 818.9,1381.46 ; 818.85,1380.72 ccw(c812.9,1381.46) 818.9,1381.46
  Bottom Layer w6: v1(815,1350) 817.96,1352.96 817.96,1396.5 CM1.72@818.9,1397.44
SD_DAT7: CM1.70 CM4.70 | length 134.4
  Top Layer w6: v1(835,1325) CM4.70@835,1386.85
  Bottom Layer w6: CM1.70@834.65,1397.44 834.65,1360.17 835,1359.81 v1(835,1325)
SD_PWR_ON: CM1.75 CM4.75 | length 93.7
  Top Layer w6: v1(780,1475) 780,1479.87 787.4,1487.27 CM4.75@787.4,1518.9
  Bottom Layer w6: v1(780,1475) 780,1479.87 787.4,1487.27 CM1.75@787.4,1518.7
SD_VDD_OR: CM1.73 CM4.73 | length 139.4
  Top Layer w6: v1(800,1450.42) 802.21,1452.63 802.21,1517.96 CM4.73@803.15,1518.9
  Bottom Layer w6: v1(800,1450.42) 802.21,1452.63 802.21,1517.76 CM1.73@803.15,1518.7
USB_N: CM1.103 CM4.103 | length 152.9
  Top Layer w6: CM4.103@1354.33,183.46 1354.66,188.86 v1@1354.66,255.66 ; CM4.103@1354.99,194.08 ccw(c1349,194.43) CM4.103@1355,194.43
  Bottom Layer w6: CM1.103@1354.33,183.27 1354.33,246.46 1363,255.13 v1(1363,260)
USB_OTG: CM1.101 CM4.101 | length 86.4
  Top Layer w6: CM4.101@1370.08,183.46 1370.08,209.47 1378.74,218.13 v1(1378.74,223)
  Bottom Layer w6: CM1.101@1370.08,183.27 1370.08,209.47 1378.74,218.13 v1(1378.74,223)
USB_P: CM1.105 CM4.105 | length 146.8
  Top Layer w6: CM4.105@1338.33,183.96 v1@1338.33,250.81
  Bottom Layer w6: v1(1334,260.01) 1334,255.14 1338.58,250.56 CM1.105@1338.58,183.27 CM1.105@1339.52,182.33
VDAC_COMP: CM1.111 CM4.111 | length 94.4
  Top Layer w6: v1(1290,230) 1290.67,229.33 1290.67,184.13 CM4.111@1291.34,183.46
  Bottom Layer w6: v1(1290,230) 1290.67,229.33 1290.67,183.94 CM1.111@1291.34,183.27
WL_DIS: CM1.89 CM4.89 | length 97.9
  Top Layer w6: CM4.89@677.17,1518.9 677.17,1493.87 ccw(c683.17,1493.88) 678.9,1489.65 690,1478.55 v1(690,1475.04)
  Bottom Layer w6: CM1.89@677.17,1518.7 677.17,1491.91 690,1479.07 v1(690,1475.04)
pads on no net: CM1.20 CM1.49 CM1.76 CM1.104 CM1.106 CM1.119 CM4.20 CM4.49 CM4.76 CM4.104 CM4.106 CM4.119
copper on no net: | length 7462.7
  Top Layer w10: 0.46,159.35 0.46,105.92 1.27,94.07 7.99,71.91 18.91,51.49 33.59,33.59 51.49,18.9 79.04,4.18 95.6,-0.85 2077.21,-0.85 2085.95,1.8 2116.43,18.1 2134.33,32.79 2149.02,50.68 2162.48,75.88 ccw(c2153.66,80.59) 2163.23,77.69 2170,100 ccw(c2160.6,103.41) 2170.6,103.41 2170.6,1472.34 ccw(c2160.6,1472.34) 2170.17,1475.24 2162.39,1500.89 2151.47,1521.31 2136.78,1539.21 2118.89,1553.9 2098.47,1564.81 2068.57,1573.88 2068.57,1573.8 117.11,1573.8 94.07,1571.53 71.91,1564.81 51.49,1553.9 33.59,1539.21 18.91,1521.31 7.99,1500.89 1.27,1478.73 -1,1455.69 0.46,1416.15 7.18,1393.99 18.1,1373.57 32.79,1355.67 50.68,1340.98 70.24,1330.53 ; 0.46,159.39 cw(c10.46,159.35) 0.91,162.29 5.37,177.02 cw(c14.94,174.12) 6.12,178.83 18.1,201.23 32.79,219.13 50.68,233.82 70.24,244.27 ; 72.05,245.02 132.9,263.48 ccw(c121.82,300.02) 160,300.02 160,1274.78 ccw(c121.82,1274.78) 132.9,1311.32 72.05,1329.78

## Polygon pours and split planes (outlines as drawn)
GND on Bottom Layer "GND_L02_P017" (solid, pour order 17): 72.91,8.99 95.07,2.27 103,-1 240.27,-0.93 240.27,-1.2 263.31,-3.47 285.47,-10.19 305.89,-21.1 323.78,-35.79 338.47,-53.69 349.39,-74.11 356.11,-96.27 358.38,-119.31 358,-119.31 358,-409.89 360.75,-437.82 365.99,-455.09 376.91,-475.51 391.59,-493.41 409.49,-508.1 428.62,-518.32 451.64,-525.3 2052.27,-525.3 2052.27,-526 2075.31,-523.73 2097.47,-517.01 2117.89,-506.1 2135.78,-491.41 2150.47,-473.51 2161.39,-453.09 2168.11,-430.93 2170.38,-407.89 2171,-405.58 2171,-7 2170.11,-8.62 2170.11,1479.73 2163.39,1501.89 2152.47,1522.31 2137.78,1540.21 2119.89,1554.9 2099.47,1565.81 2069.57,1574.88 2069.57,1574.8 118.11,1574.8 95.07,1572.53 72.91,1565.81 52.49,1554.9 34.59,1540.21 19.91,1522.31 8.99,1501.89 2.27,1479.73 0,1456.69 0,118.11 2.27,95.07 8.99,72.91 19.91,52.49 34.59,34.59 52.49,19.9
1V8 on Bottom Layer "1V8_L02_P000" (solid, pour order 0): 673,1411 673,1361 669,1357 669,1276 677,1268 694,1268 699,1273 699,1411
5V on Bottom Layer "5V_L02_P005" (solid, pour order 5): 689,1533 689,1462 712,1439 756,1439 769,1452 769,1492 776,1499 776,1533
3V3 on Bottom Layer "3V3_L02_P001" (solid, pour order 1): 728.57,1411 728.57,1361 732.57,1357 732.57,1276 724.57,1268 707.57,1268 702.57,1273 702.57,1411
GND on Top Layer "GND_L01_P019" (solid, pour order 19): 33.59,33.59 51.49,18.9 79.04,4.18 95.6,-0.85 2077.21,-0.85 2085.95,1.8 2116.43,18.1 2134.33,32.79 2149.02,50.68 2162.48,75.88 ccw(c2153.66,80.59) 2163.23,77.69 2170,100 ccw(c2160.6,103.41) 2170.6,103.41 2170.6,1472.34 ccw(c2160.6,1472.34) 2170.17,1475.24 2162.39,1500.89 2151.47,1521.31 2136.78,1539.21 2118.89,1553.9 2098.47,1564.81 2068.57,1573.88 2068.57,1573.8 117.11,1573.8 94.07,1571.53 71.91,1564.81 51.49,1553.9 33.59,1539.21 18.91,1521.31 7.99,1500.89 1.27,1478.73 -1,1455.69 0.46,1416.15 7.18,1393.99 18.1,1373.57 32.79,1355.67 50.68,1340.98 70.24,1330.53 72.05,1329.78 132.9,1311.32 cw(c121.82,1274.78) 160,1274.78 160,300.02 cw(c121.82,300.02) 132.9,263.48 72.05,245.02 70.24,244.27 50.68,233.82 32.79,219.13 18.1,201.23 6.12,178.83 ccw(c14.94,174.12) 5.37,177.02 0.91,162.29 ccw(c10.46,159.35) 0.46,159.39 0.46,105.92 1.27,94.07 7.99,71.91 18.91,51.49
1V8 on Top Layer "1V8_L01_P002" (solid, pour order 2): 673,1411.2 673,1361.2 669,1357.2 669,1276.2 677,1268.2 694,1268.2 699,1273.2 699,1411.2
5V on Top Layer "5V_L01_P004" (solid, pour order 4): 689,1533 689,1462 712,1439 756,1439 769,1452 769,1492 776,1499 776,1533
3V3 on Top Layer "3V3_L01_P003" (solid, pour order 3): 728.57,1411.2 728.57,1361.2 732.57,1357.2 732.57,1276.2 724.57,1268.2 707.57,1268.2 702.57,1273.2 702.57,1411.2

## Silkscreen, mask and mechanical layers (free items; w line width, h text height)
Top Overlay:
  lines w4.72: 1393.32,1383.68 1432.69,1383.68 ; 1393.32,1532.68 1432.69,1532.68
Bottom Overlay:
  lines w4.72: 1402.31,1383 1433.07,1383 ; 1402.31,1532 1433.07,1532
Mechanical 1:
  drawing of 575 lines, arcs and shapes, not listed

## Text inside footprints (layer, text, board x,y; h text height)
CM4: Mechanical 4 "SD" at 807.42,1436.22 h27.56; Mechanical 4 "GPIO" at 1058.09,1440.16 h27.56; Mechanical 4 "USB" at 1245.44,125.2 h27.56; Mechanical 4 "CAM1" at 1053.17,125.2 h27.56; Mechanical 4 "PCIe" at 1202.78,81.89 h27.56; Mechanical 4 "TV" at 1190.97,121.26 h27.56; Mechanical 4 "CAM0" at 1051.85,81.89 h27.56; Mechanical 4 "HDMI0" at 674.23,81.89 h27.56; Mechanical 4 "5V" at 692.91,1459.84 h27.56; Mechanical 4 "DS1" at 568.92,101.58 h27.56; Mechanical 4 "3V3" at 743.12,1412.6 h27.56; Mechanical 4 "ETH" at 1269.71,1440.16 h27.56; Mechanical 4 "HDMI1" at 848.11,77.95 h27.56; Mechanical 4 "1V8" at 640.76,1412.6 h27.56; Mechanical 4 "DSI0" at 809.08,125.2 h27.56